# EAGLE board Rover Motor Controller (EAGLE 7.1.0)
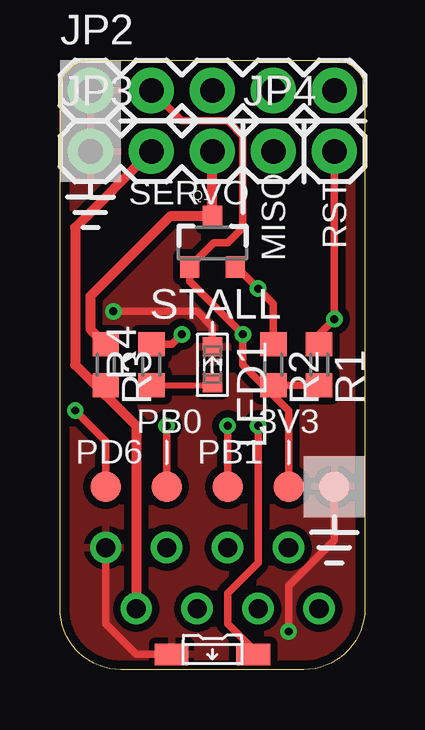
[diagram p0: board, top side]
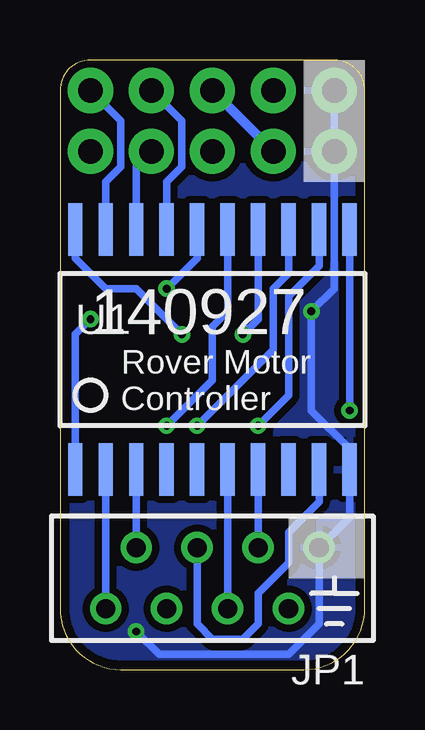
[diagram p1: board, bottom side, seen from below]

Size 12.7 x 25.4 mm. Coordinates in mm from the lower left corner, seen from the top.
Outline: 12.7,24.13 12.7,2.54 arc-90 10.16,0 2.54,0 arc-90 0,2.54 0,24.13 arc-90 1.27,25.4 11.43,25.4 arc-90 12.7,24.13
Copper layers (1*16): Top 0.035mm / dielectric 1.5mm / Bottom 0.035mm
Design rules "2-Layer DRC": minimum track width 8mil, minimum drill 13mil, track to track 6mil, track to pad 6mil, pad to pad 6mil, via to via 6mil, smd to smd 6mil, copper to edge 15mil, drill to drill 6mil, minimum pad ring 10mil, minimum via ring 7mil, stop-mask expansion 0mil, vias tented up to drill 16mil, thermal gap 10mil

## Footprints (pad centres in the part's own frame; a part is rotated, then mirrored left to right if it is on the bottom)
M-08-MICRO-MATCH-PTH = drill 0.8 pad 1.27: 1 -4.445,-1.27; 2 -3.175,1.27; 3 -1.905,-1.27; 4 -0.635,1.27; 5 0.635,-1.27; 6 1.905,1.27; 7 3.175,-1.27; 8 4.445,1.27
M-1X05-0.1-PTH = drill 1.016 pad 1.88: 1 -5.08,0; 2 -2.54,0; 3 0,0; 4 2.54,0; 5 5.08,0
M-1X03-0.1-PTH = drill 1.016 pad 1.88: 1 -2.54,0; 2 0,0; 3 2.54,0
M-1X02-0.1-PTH = drill 1.016 pad 1.88: 1 -1.27,0; 2 1.27,0
SML0603 = smd 0.8 x 0.8: A 0.75,0; C -0.75,0
LED-SMD-RA = smd 1.4 x 0.9: A 1.7,0; C -1.7,0
SOT23-3 = smd 0.8 x 0.9: 1 -0.95,-1; 2 0.95,-1; 3 0,1.1
R0603 = smd 1 x 1.1: 1 -0.85,0; 2 0.85,0
PAD.03X.05 = smd 1.27 x 1.27: P$1 0,0
SOP20W = smd 0.6 x 2.2: 1 -5.715,-5; 2 -4.445,-5; 3 -3.175,-5; 4 -1.905,-5; 5 -0.635,-5; 6 0.635,-5; 7 1.905,-5; 8 3.175,-5; 9 4.445,-5; 10 5.715,-5; 11 5.715,5; 12 4.445,5; 13 3.175,5; 14 1.905,5; 15 0.635,5; 16 -0.635,5; 17 -1.905,5; 18 -3.175,5; 19 -4.445,5; 20 -5.715,5

## Placement (x,y rotation side)
JP1  M-08-MICRO-MATCHPTH  [M-08-MICRO-MATCH-PTH]  6.35,3.81 180 bottom
JP2  M-1X05PTH  [M-1X05-0.1-PTH]  6.35,24.13 0 top
JP3  M-1X03PTH  [M-1X03-0.1-PTH]  3.81,21.59 0 top
JP4  M-1X02PTH  [M-1X02-0.1-PTH]  10.16,21.59 0 top
LED1  Red  [SML0603]  6.35,12.7 270 top
LED2  White  [LED-SMD-RA]  6.35,0.64 0 top
Q1  MOSFET-NCHANNELBSS123LT1G  [SOT23-3]  6.35,17.78 0 top
R1  10k  [R0603]  10.79,12.7 270 top
R2  10k  [R0603]  8.89,12.7 270 top
R3  10k  [R0603]  1.91,12.7 270 top
R4  1k  [R0603]  3.81,12.7 90 top
TP1  TEST-POINT3X5  [PAD.03X.05]  6.99,7.62 0 top
TP2  TEST-POINT3X5  [PAD.03X.05]  4.45,7.62 0 top
TP3  TEST-POINT3X5  [PAD.03X.05]  1.91,7.62 0 top
TP4  TEST-POINT3X5  [PAD.03X.05]  9.53,7.62 0 top
TP5  TEST-POINT3X5  [PAD.03X.05]  11.43,7.62 0 top
U1  ATTINY2313A  [SOP20W]  6.35,13.34 0 bottom

## Library data of the parts
JP1-JP4 LED2 = Jordi
LED1 = led
Q1 = SparkFun-DiscreteSemi; PROD_ID: TRANS-08345
R1-R4 = rcl
TP1-TP5 = SparkFun-Passives
U1 = SparkFun-DigitalIC; PROD_ID: IC-11305

## Nets
+3V3: JP2.2 Q1.1 R1.2 R2.2 TP4.P$1 U1.20
GND: JP1.1 JP2.1 JP3.1 LED1.C LED2.C TP5.P$1 U1.10
IN1: JP1.3 U1.7
IN2: JP1.4 U1.6
LAMP: LED2.A U1.15
MISO: JP4.1 U1.18
N$2: Q1.2 R2.1 U1.16
N$4: LED1.A R4.1
PB0: TP2.P$1 U1.12
PB1: TP1.P$1 U1.13
PD6: TP3.P$1 U1.11
PWM: JP1.5 U1.9
QEA: JP1.7 U1.3
QEB: JP1.8 U1.2
RST: JP4.2 R1.1 U1.1
SCL: JP2.5 U1.19
SDA: JP2.4 U1.17
SERVO: JP3.3 Q1.3 R3.1
STALL: R4.2 U1.14
STANDBY: JP1.6
VCC: JP1.2 JP2.3 JP3.2 R3.2

## Tracks (layer width: path | path; a pad name or v marks a point on that pad's centre or on a via)
+3V3  (via drill 0.33)
  Top 0.305: R2.2 R1.2 | JP2.2 5.08,22.86 6.99,22.86 7.62,22.23 7.62,18.41 6.99,17.78 6.4,17.78 Q1.1 5.4,16.19 v7.62,13.97 7.62,12.7 8.47,11.85 R2.2 | TP4.P$1 9.53,10.79 8.89,11.43 R2.2
  Bottom 0.305: v7.62,13.97 9.53,15.88 10.79,15.88 12.06,17.14 U1.20
GND  (via drill 0.33)
  Top 0.305: JP1.1 1.91,1.91 3.17,0.64 LED2.C | LED1.C 6.35,14.29 5.71,14.92 v2.22,14.92 | TP5.P$1 11.43,5.4 9.53,3.49 v9.53,1.59
  Bottom 0.305: JP2.1 JP3.1 1.27,15.88 v2.22,14.92 2.22,10.79 0.64,9.21 U1.10 0.64,6.35 JP1.1 1.91,1.91 3.17,0.64 8.57,0.64 v9.53,1.59
  pour Bottom (isolate 0.305): 12.7,24.13 12.7,2.54 arc-90 10.16,0 2.54,0 arc-90 0,2.54 0,24.13 arc-90 1.27,25.4 11.43,25.4 arc-90
  pour Top (isolate 0.305): 12.7,24.13 12.7,2.54 arc-90 10.16,0 2.54,0 arc-90 0,2.54 0,24.13 arc-90 1.27,25.4 11.43,25.4 arc-90
IN1
  Bottom 0.305: JP1.3 U1.7
IN2
  Bottom 0.305: JP1.4 U1.6
LAMP  (via drill 0.33)
  Top 0.254: 8.26,0.64 LED2.A
  Top 0.305: 8.26,0.64 6.99,1.91 6.99,3.17 8.26,4.45 v8.26,10.16
  Bottom 0.305: U1.15 5.71,14.92 6.35,14.29 6.35,12.06 v8.26,10.16
MISO
  Bottom 0.305: JP4.1 9.53,20.95 U1.18
N$2  (via drill 0.33)
  Top 0.305: R2.1 8.89,15.24 v8.26,15.88 7.35,16.78 Q1.2
  Bottom 0.305: U1.16 6.99,17.14 v8.26,15.88
N$4
  Top 0.254: R4.1 6.25,11.85
  Top 0.406: 6.25,11.85 LED1.A
PB0  (via drill 0.33)
  Top 0.305: TP2.P$1 v4.45,10.16
  Bottom 0.305: v4.45,10.16 3.17,11.43 3.17,15.56 1.91,16.83 U1.12
PB1  (via drill 0.33)
  Top 0.305: v6.99,10.16 TP1.P$1
  Bottom 0.305: U1.13 3.17,16.51 3.81,15.88 3.81,13.34 v6.99,10.16
PD6  (via drill 0.33)
  Top 0.305: v0.64,10.79 1.91,9.53 TP3.P$1
  Bottom 0.305: U1.11 v0.64,10.79
PWM
  Bottom 0.305: JP1.5 6.99,1.91 6.35,1.27 5.08,1.27 4.45,1.91 4.45,3.17 3.17,4.45 3.17,5.71 1.91,6.99 U1.9
QEA
  Bottom 0.305: JP1.7 U1.3
QEB
  Bottom 0.305: JP1.8 U1.2
RST  (via drill 0.33)
  Top 0.305: R1.1 10.79,13.97 v11.43,14.61 JP4.2
  Bottom 0.305: U1.1 12.06,13.97 v11.43,14.61
SCL
  Bottom 0.305: U1.19 10.79,20.32 10.16,20.95 10.16,22.86 JP2.5
SDA
  Bottom 0.305: U1.17 8.26,20.32 7.62,20.95 7.62,22.86 JP2.4
SERVO
  Top 0.406: JP3.3 Q1.3 4.59,18.88 1.27,15.56 1.27,14.19 R3.1
STALL  (via drill 0.33)
  Top 0.305: v5.08,13.97 4.66,13.55 R4.2
  Bottom 0.305: U1.14 4.45,14.61 v5.08,13.97
VCC
  Top 0.406: JP1.2 3.17,10.16 1.91,11.43 R3.2 1.49,11.85 0.64,12.7 0.64,18.41 JP3.2
  Bottom 0.406: JP3.2 JP2.3

## Text on the board
_tsilk: SERVO | RST | MISO | STALL | PB0 | 3V3 | PD6 | PB1
_bsilk: 140927 | Rover Motor / Controller